# Altium PCB LPGDetA1.PcbDoc
Units mm, origin at the board's own origin, x right, y up, seen from the top; angles counter-clockwise.
Board outline 105 x 100 mm, 2 copper layers (Top Layer, Bottom Layer), stack 1.62 mm thick; 159 components, 86 nets, 376 pads, 81 vias.
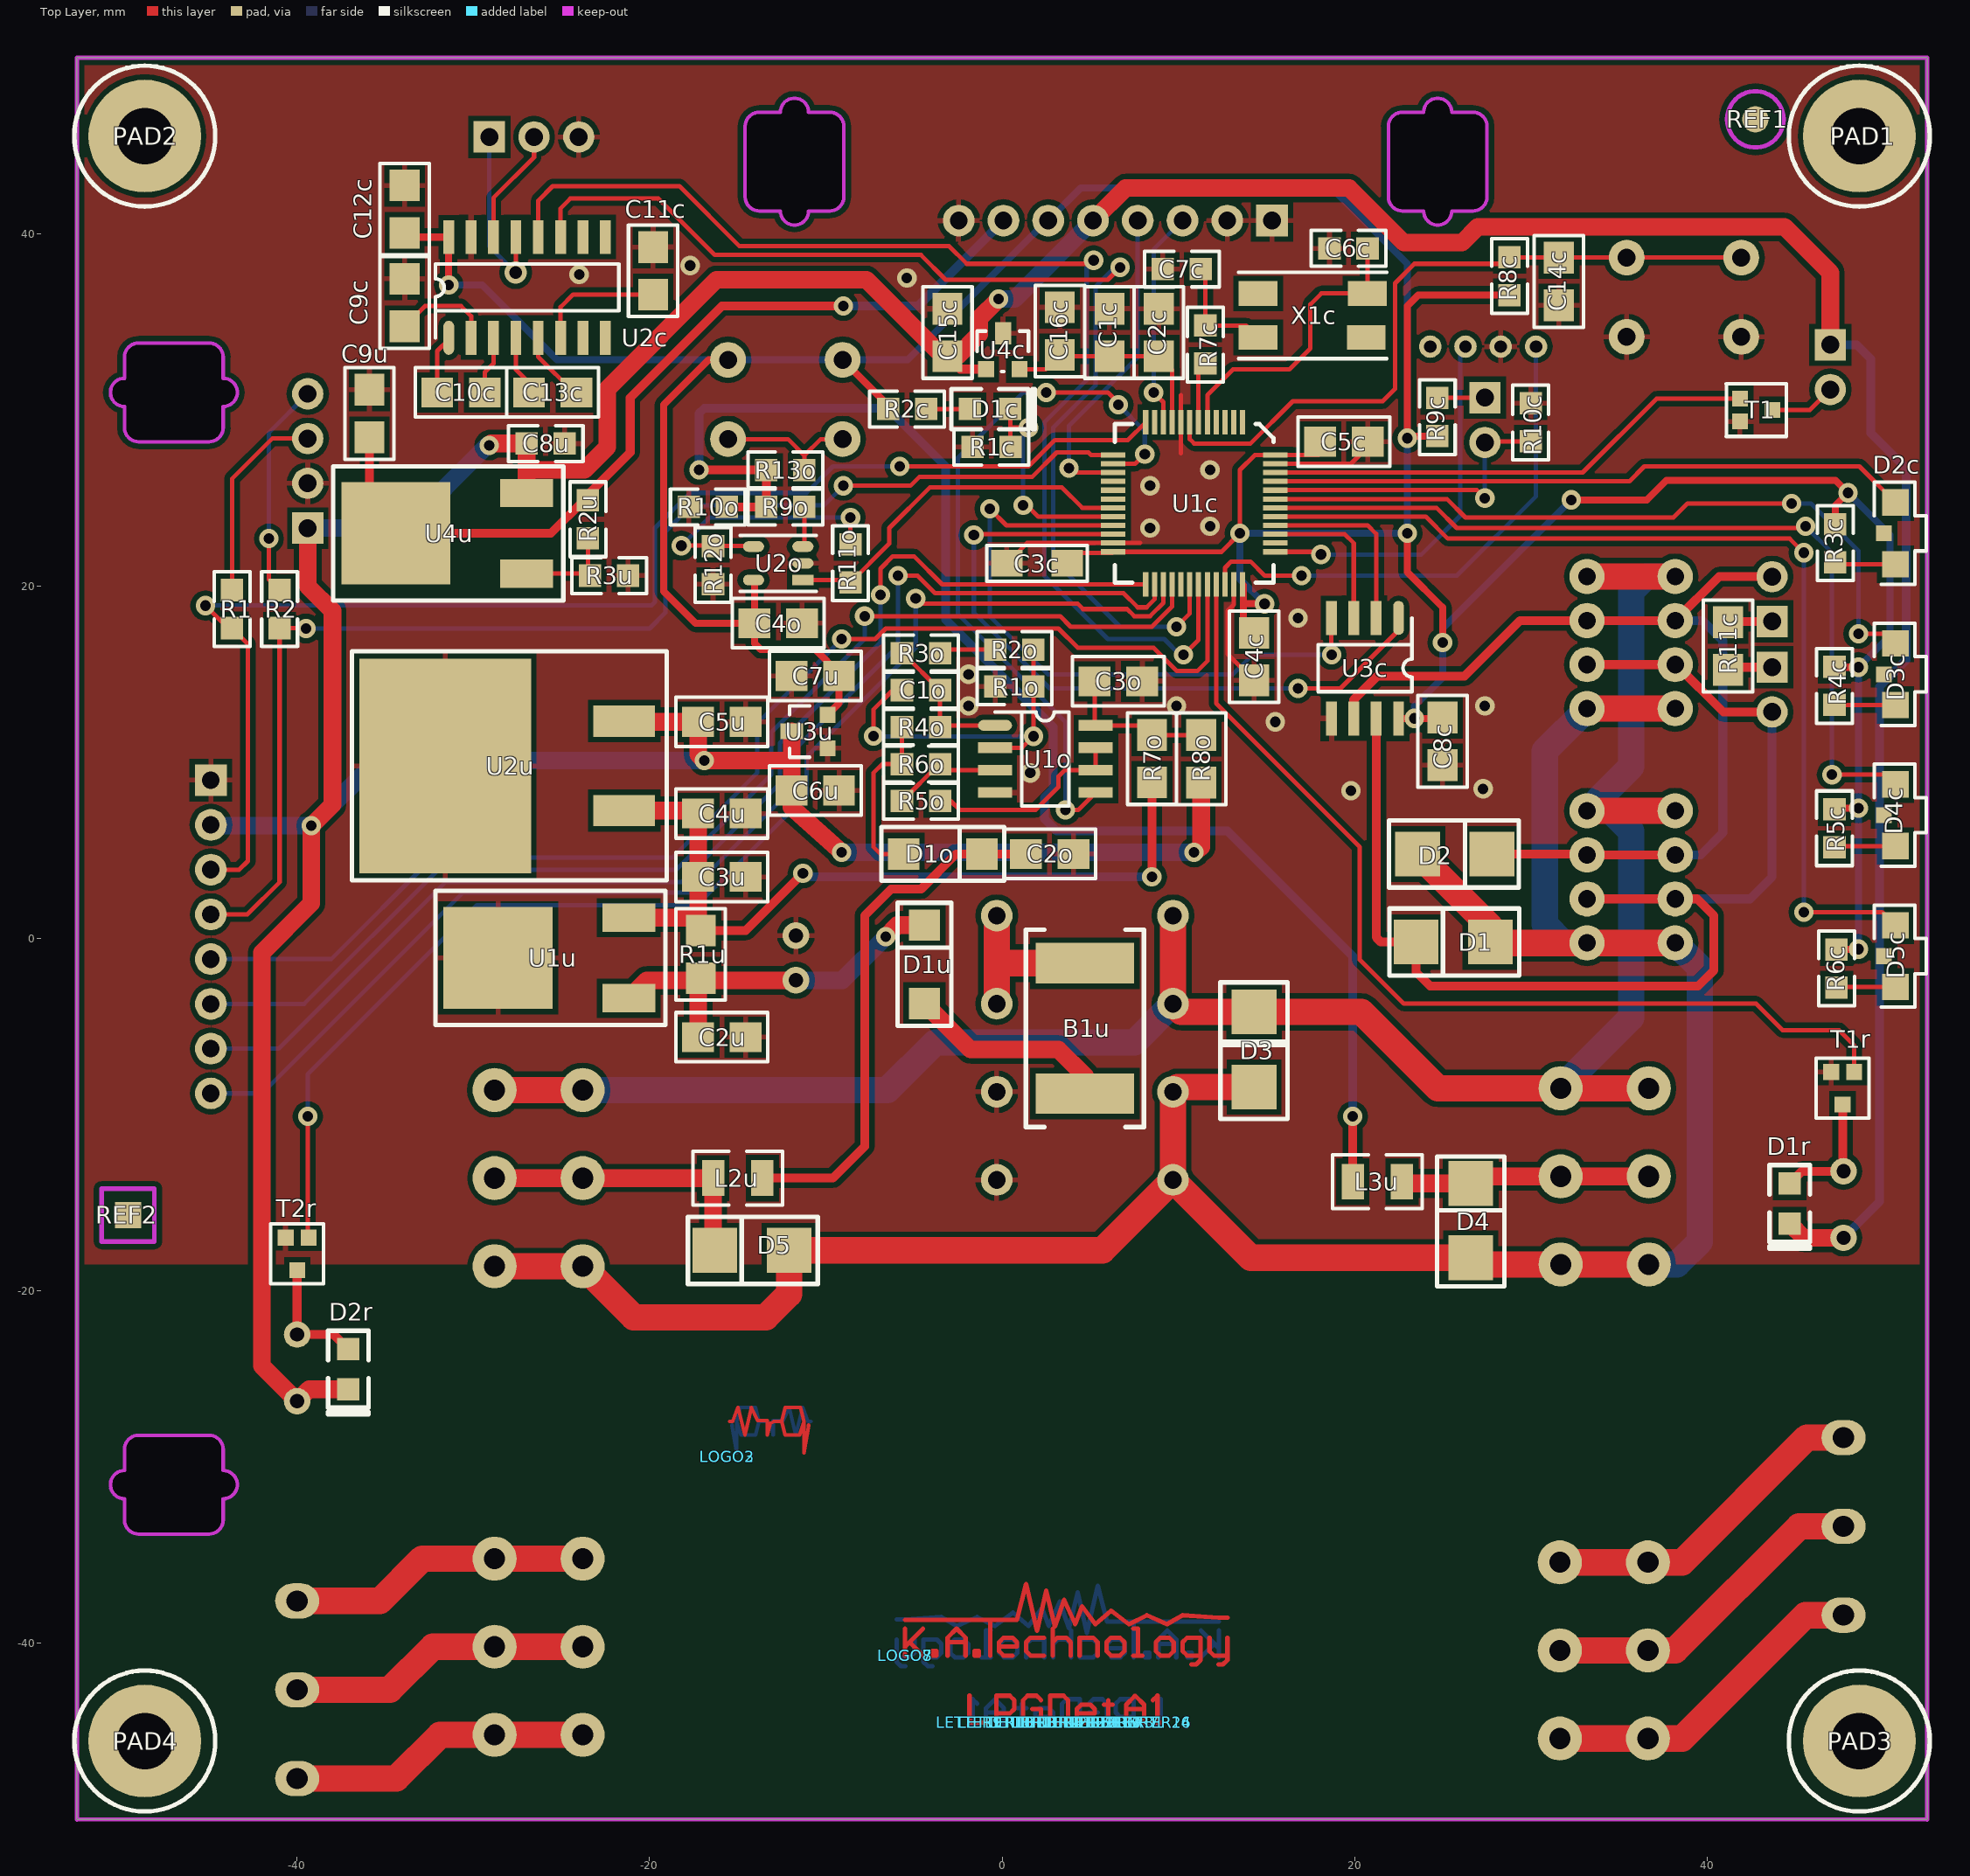
[diagram p0: Top Layer view]
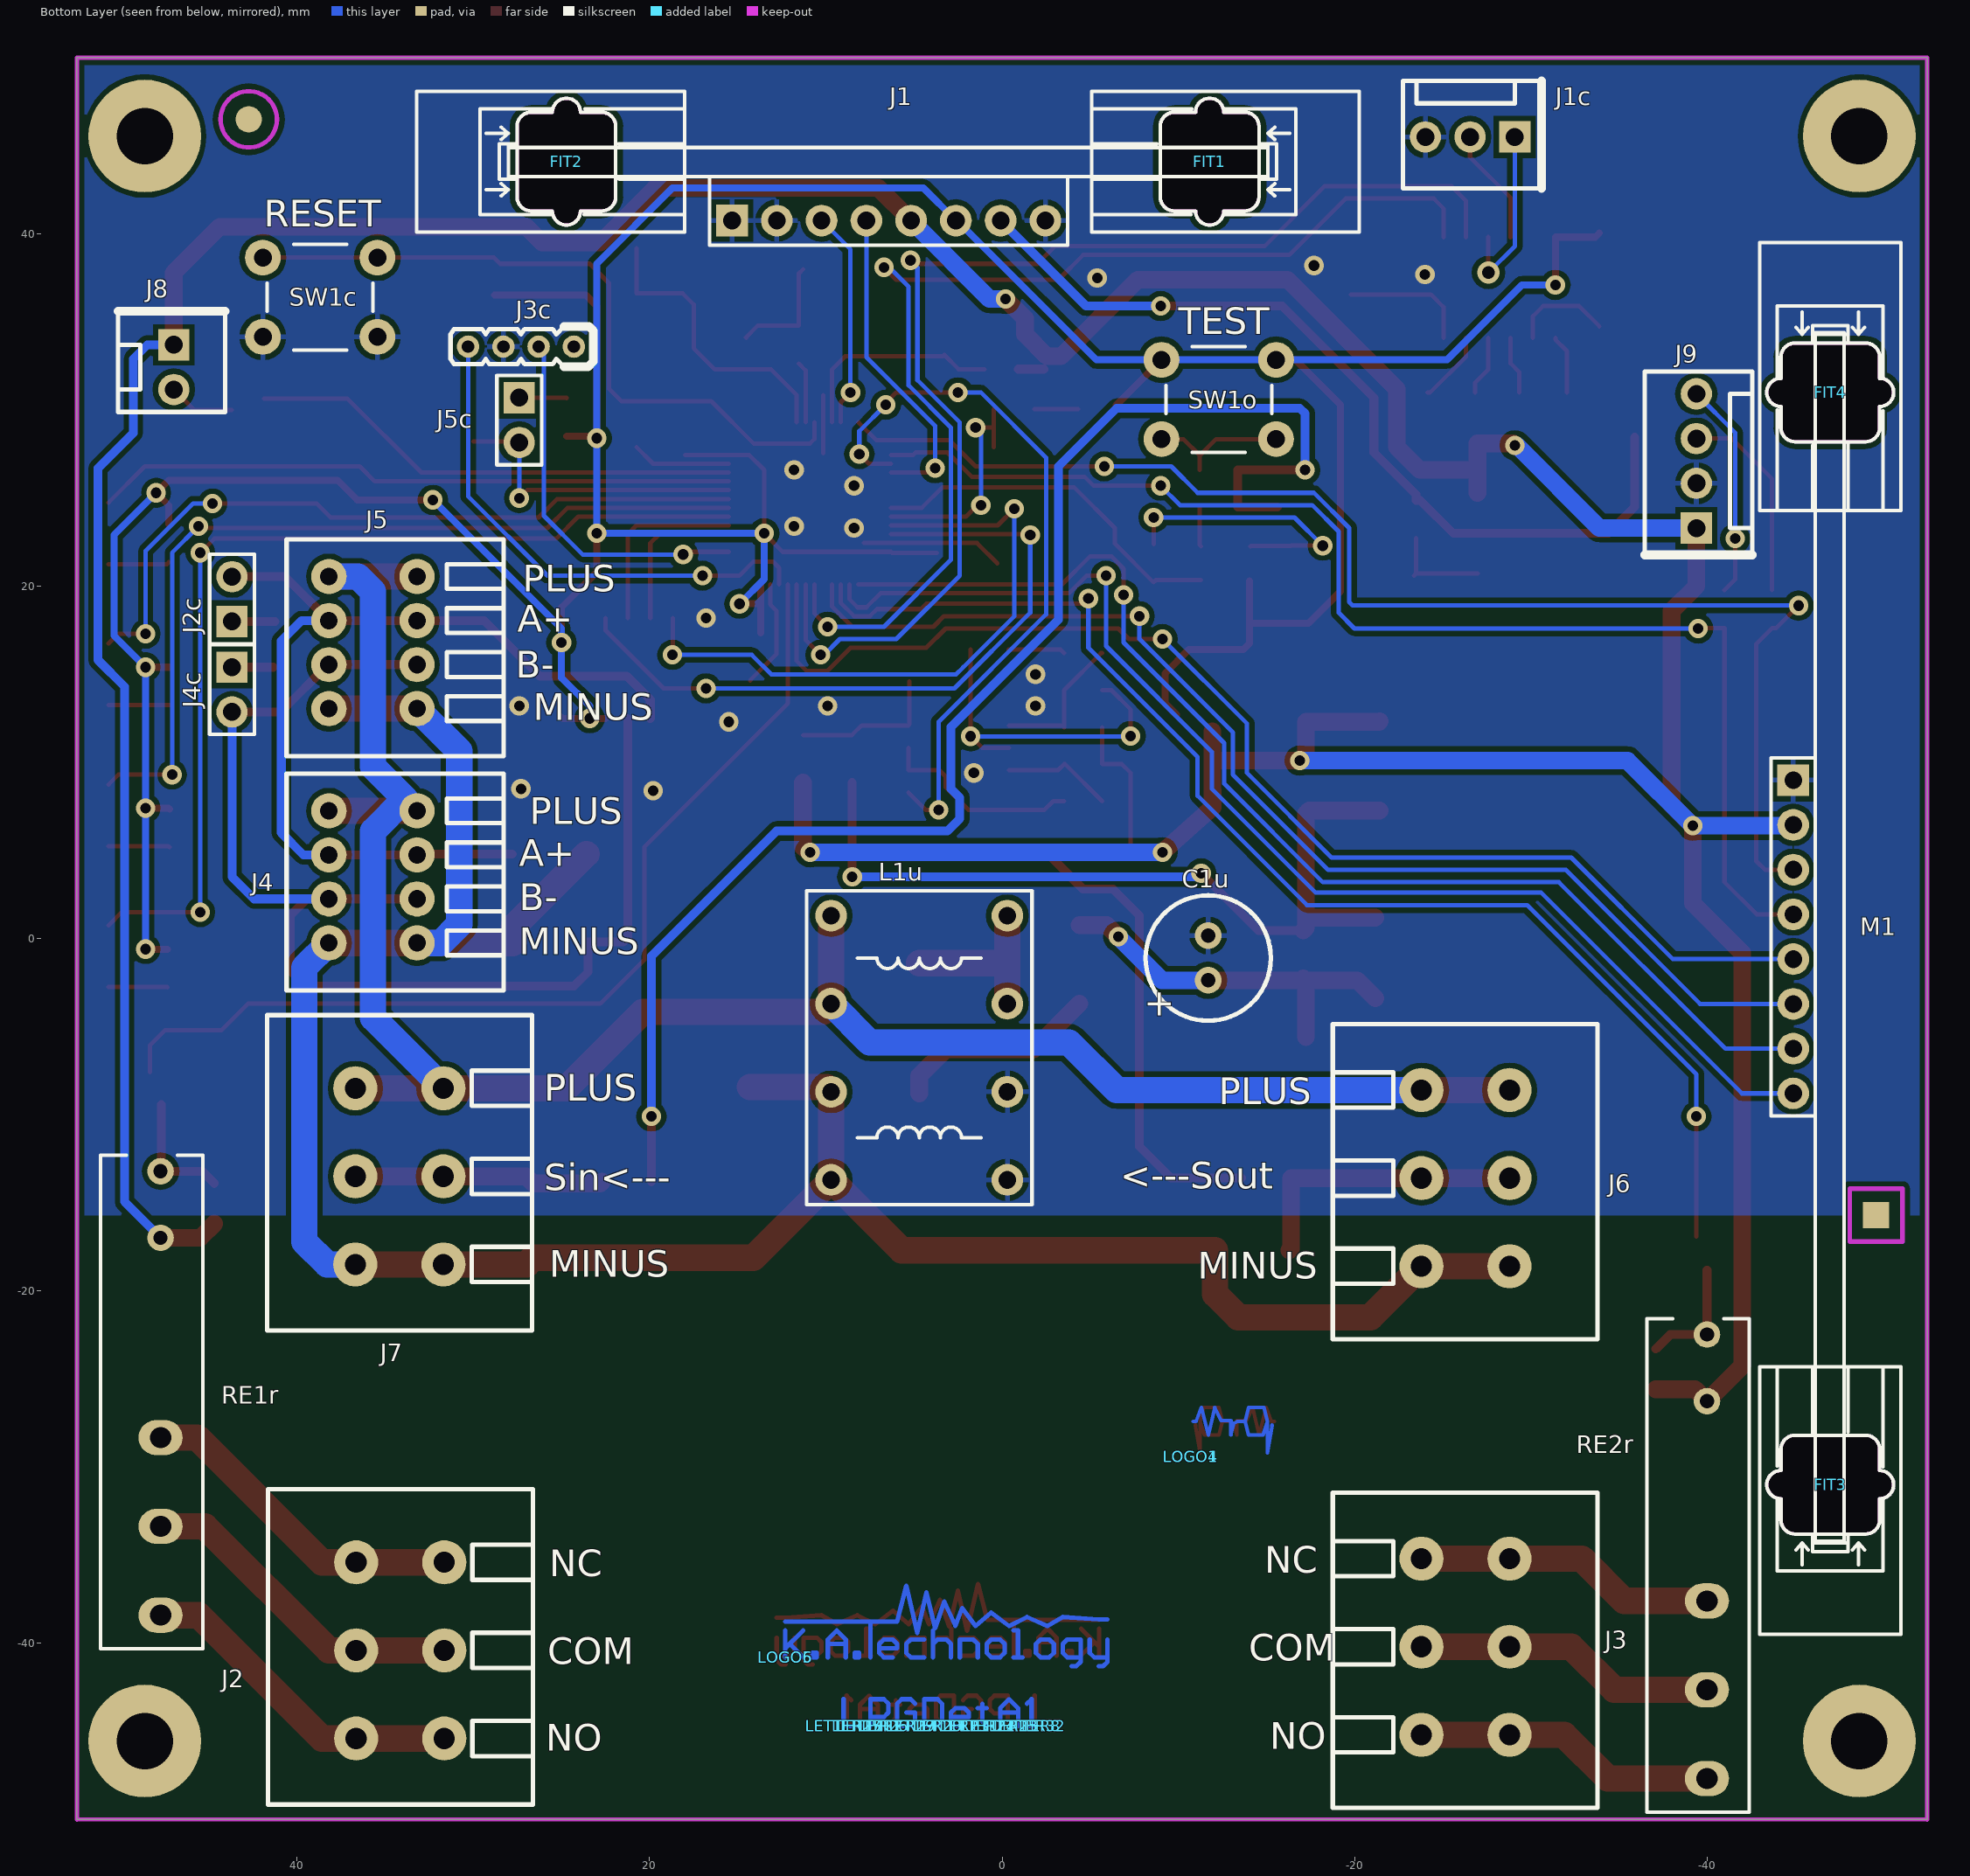
[diagram p1: Bottom Layer view, seen from below]

## Layer stack, top to bottom
Top Layer: signal copper 0.035
Dielectric: core 1.55, FR-4, Dk 4.8
Bottom Layer: signal copper 0.035

## Board outline
-52.5,-50 -52.5,50 52.5,50 52.5,-50

## Design rules (kind name [scope] priority, off if disabled: settings)
Clearance InPolyClearance [InPoly] p1: gap=0.3
Clearance [All] p2: gap=0.2
ComponentClearance [All] p1 off: gap=0.254 collisioncheckmode=3 verticalgap=0.254 showdistances=FALSE
Height [All] p1: minheight=0 maxheight=40 prefheight=12.7
HoleSize [All] p1: absolutevalues=TRUE maxlimit=6 minlimit=0.025 maxpercent=80.000 minpercent=20.000
MinimumSolderMaskSliver [not(IsComponentPrimitive and OnSolderMask)] p1: minsoldermaskwidth=0.1
PolygonConnect PolygonConnectDirect [IsVia] p1: connectstyle=Direct reliefconductorwidth=0.254 reliefentries=4 polygonreliefangle="90 Angle"
PolygonConnect PolygonConnectElse [All] p2: connectstyle=Relief reliefconductorwidth=0.3 reliefentries=4 polygonreliefangle="90 Angle"
RoutingVias [All] p1: holewidth=0.6 width=1.1 viastyle="Through Hole" minholewidth=0.5 minwidth=1 maxholewidth=2 maxwidth=4
SilkToSilkClearance [All] p1 off: silktosilkclearance=0.254
SilkscreenOverComponentPads [OnBottomSilkscreen] p1: minsilkscreentomaskgap=0.1
SolderMaskExpansion [All] p1: expansion=0.102
Width [All] p1: maxlimit=4 minlimit=0.2 preferedwidth=0.3
22 further rules are at their usual default settings.

## Classes and differential pairs
component class CPU: C1c C2c C3c C4c C5c C6c C7c C8c C9c C10c C11c C12c C13c C14c C15c C16c D1c D2c D3c D4c D5c J1c J2c J3c J4c J5c R1c R2c R3c R4c R5c R6c R7c R8c R9c R10c R11c SW1c U1c U2c U3c U4c X1c
component class LPGDetA1_main: D1 D2 D3 D4 D5 J1 J2 J3 J4 J5 J6 J7 J8 J9 M1 R1 R2 T1
component class Out: C1o C2o C3o C4o D1o R1o R2o R3o R4o R5o R6o R7o R8o R9o R10o R11o R12o R13o SW1o U1o U2o
component class Supply: B1u C1u C2u C3u C4u C5u C6u C7u C8u C9u D1u L1u L2u L3u R1u R2u R3u U1u U2u U3u U4u
component class Mechanical: FIT1 FIT2 FIT3 FIT4 LETTER1 LETTER2 LETTER3 LETTER4 LETTER5 LETTER6 LETTER7 LETTER8 LETTER9 LETTER10 LETTER11 LETTER12 LETTER13 LETTER14 LETTER15 LETTER16 LETTER17 LETTER18 LETTER19 LETTER20 LETTER21 LETTER22 LETTER23 LETTER24 LETTER25 LETTER26 LETTER27 LETTER28 LETTER29 LETTER30 LETTER31 LETTER32 LOGO1 LOGO2 LOGO3 LOGO4 LOGO5 LOGO6 LOGO7 LOGO8 PAD1 PAD2 PAD3 PAD4 REF1 REF2
component class Relay: D1r D2r RE1r RE2r T1r T2r

## Components (designator, comment, footprint, x,y, rotation, side; value= is the part's Value field where it differs from the comment)
B1u "SL030-60" 2920 4.7,-5.1 r90 top
C1c "C0805C105K4RAC" 1206_0805 6.1,34.4 r90 top
C1o "CL21C220JBANNNC" 0805 -4.6,14.1 r0 top
C1u "SD1V107M6L011BB" CE1028 -11.7,-1.1 r90 bottom
C2c "CL21B103KBANNNC" 1206_0805 8.9,34.4 r90 top
C2o "CL21B104KBCNNNC" 1206_0805 2.7,4.8 r180 top
C2u "CL21B104KBCNNNC" 1206_0805 -15.9,-5.6 r0 top
C3c "CL31B475KPHNNNE" 1206-IPC 3.7,21.3 r180 top
C3o "CL21B104KBCNNNC" 1206_0805 6.6,14.6 r0 top
C3u "CL21B104KBCNNNC" 1206_0805 -15.9,3.5 r0 top
C4c "CL21B104KBCNNNC" 1206_0805 14.3,16 r270 top
C4o "CL21B104KBCNNNC" 1206_0805 -12.7,17.9 r0 top
C4u "CL21B104KBCNNNC" 1206_0805 -15.9,7.1 r0 top
C5c "CL21B104KBCNNNC" 1206_0805 19.4,28.2 r0 top
C5u "CL21B104KBCNNNC" 1206_0805 -15.9,12.3 r0 top
C6c "CL21C220JBANNNC" 0805 19.663,39.178 r0 top
C6u "C0805C105K4RAC" 1206_0805 -10.6,8.4 r0 top
C7c "CL21C220JBANNNC" 0805 10.2,38 r0 top
C7u "C0805C105K4RAC" 1206_0805 -10.6,14.9 r180 top
C8c "CL21B104KBCNNNC" 1206_0805 25,11.2 r90 top
C8u "C0805C105K4RAC" 0805 -25.9,28.1 r0 top
C9c "CL21B104KBCNNNC" 1206_0805 -33.9,36.1 r90 top
C9u "C0805C105K4RAC" 1206_0805 -35.9,29.8 r90 top
C10c "CL21B104KBCNNNC" 1206_0805 -30.7,31 r0 top
C11c "CL21B104KBCNNNC" 1206_0805 -19.8,37.9 r90 top
C12c "CL21B104KBCNNNC" 1206_0805 -33.9,41.4 r90 top
C13c "CL21B104KBCNNNC" 1206_0805 -25.5,31 r0 top
C14c "CL21B104KBCNNNC" 1206_0805 31.6,37.3 r270 top
C15c "C0805C105K4RAC" 1206_0805 -3.1,34.4 r90 top
C16c "CL21B104KBCNNNC" 1206_0805 3.28,34.479 r90 top
D1 "P6SMB15A" SMB 23.5,-0.2 r90 top
D1c "OF-SMD2012R" D0805 -1.833,30.059 r0 top
D1o "10MQ040N" SMA -3.3,4.8 r270 top
D1r "1N4148-0805" D0805 44.7,-13.9 r270 top
D1u "10MQ040N" SMA -4.4,-1.4 r0 top
D2 "P6SMB15A" SMB 27.8,4.8 r270 top
D2c "KPA-3010SURCK" KPA-3010SURCK 50.7,23 r270 top locked
D2r "1N4148-0805" D0805 -37.1,-23.3 r270 top
D3 "P6SMB33CA" DO-214AA 14.3,-6.3 r0 top
D3c "KPA-3010SYCK" KPA-3010SYCK 50.7,15 r270 top locked
D4 "P6SMB15A" SMB 26.6,-13.9 r0 top
D4c "KPA-3010CGCK" KPA-3010CGCK 50.7,7 r270 top locked
D5 "P6SMB15A" SMB -16.3,-17.7 r90 top
D5c "KPA-3010QBC-D" KPA-3010QBC-D 50.7,-1 r270 top locked
FIT1 "VMCG20" VMCG20 -11.779,44.1 r270 bottom
FIT2 "VMCG20" VMCG20 24.721,44.1 r90 bottom
FIT3 "VMCG20" VMCG20 -47,-31 r0 bottom
FIT4 "VMCG20" VMCG20 -47,31 r180 bottom
J1 "LPGCODetA1" LPGCODetA1 28.021,44.9 r180 bottom
J1c "WF03S" WF03S -29.1,45.5 r0 bottom
J2 "Wago256-401x3" WAGO256-401x3 31.655,-35.406 r270 bottom
J2c "JUMPERx2" 2SIP100 43.7,18 r90 bottom
J3 "Wago256-401x3" WAGO256-401x3 -23.8,-45.2 r90 bottom
J3c "PLMS4S" PLMS4S 24.3,33.6 r0 bottom
J4 "Wago233-204" Wago233-204 35.7,3.5 r270 bottom
J4c "JUMPERx2" 2SIP100 43.7,15.4 r270 bottom
J5 "Wago233-204" Wago233-204 35.7,16.8 r270 bottom
J5c "JUMPERx2" 2SIP100 27.4,30.7 r270 bottom
J6 "Wago256-401x3" WAGO256-401x3 -23.8,-18.6 r90 bottom
J7 "Wago256-401x3" WAGO256-401x3 31.7,-8.5 r270 bottom
J8 "WF02S" WF02S 47,33.7 r270 bottom
J9 "WF04S" WF04S -39.4,23.3 r90 bottom
L1u "CAX-0.4-39" IND_CAX_V 4.7,-6.2 r270 bottom
L2u "BLM31P500SPT" 1206 -15,-13.6 r0 top
L3u "BLM31P500SPT" 1206 21.3,-13.8 r180 top
LETTER1 "LETTERC_L" LETTERC_L_60_10_TL -1.848,-44.5 r0 top
LETTER2 "LETTERC_P" LETTERC_P_60_10_TL 7.472,-44.7 r180 bottom
LETTER3 "LETTERC_G" LETTERC_G_60_10_TL 1.2,-44.5 r0 top
LETTER4 "LETTERC_D" LETTERC_D_60_10_TL 2.724,-44.5 r0 top
LETTER5 "LETTER_E" LETTER_E_60_10_TL 4.248,-44.5 r0 top
LETTER6 "LETTER_T" LETTER_T_60_10_TL 5.772,-44.5 r0 top
LETTER7 "LETTERC_A" LETTERC_A_60_10_TL 7.042,-44.5 r0 top
LETTER8 "LETTER_1" LETTER_1_60_10_TL -1.418,-44.7 r180 bottom
LETTER9 "LETTERC_L" LETTERC_L_60_20_TS -1.848,-44.5 r0 top
LETTER10 "LETTERC_P" LETTERC_P_60_20_TS -0.324,-44.5 r0 top
LETTER11 "LETTERC_G" LETTERC_G_60_20_TS 1.2,-44.5 r0 top
LETTER12 "LETTERC_D" LETTERC_D_60_20_TS 2.724,-44.5 r0 top
LETTER13 "LETTER_E" LETTER_E_60_20_TS 2.9,-44.7 r180 bottom
LETTER14 "LETTER_T" LETTER_T_60_20_TS 1.376,-44.7 r180 bottom
LETTER15 "LETTERC_A" LETTERC_A_60_20_TS 0.106,-44.7 r180 bottom
LETTER16 "LETTER_1" LETTER_1_60_20_TS 8.566,-44.5 r0 top
LETTER17 "LETTERC_L" LETTERC_L_60_10_TL 8.996,-44.7 r180 bottom
LETTER18 "LETTERC_P" LETTERC_P_60_10_TL -0.324,-44.5 r0 top
LETTER19 "LETTERC_G" LETTERC_G_60_10_TL 5.948,-44.7 r180 bottom
LETTER20 "LETTERC_D" LETTERC_D_60_10_TL 4.424,-44.7 r180 bottom
LETTER21 "LETTER_E" LETTER_E_60_10_TL 2.9,-44.7 r180 bottom
LETTER22 "LETTER_T" LETTER_T_60_10_TL 1.376,-44.7 r180 bottom
LETTER23 "LETTERC_A" LETTERC_A_60_10_TL 0.106,-44.7 r180 bottom
LETTER24 "LETTER_1" LETTER_1_60_10_TL 8.566,-44.5 r0 top
LETTER25 "LETTERC_L" LETTERC_L_60_20_TS 8.996,-44.7 r180 bottom
LETTER26 "LETTERC_P" LETTERC_P_60_20_TS 7.472,-44.7 r180 bottom
LETTER27 "LETTERC_G" LETTERC_G_60_20_TS 5.948,-44.7 r180 bottom
LETTER28 "LETTERC_D" LETTERC_D_60_20_TS 4.424,-44.7 r180 bottom
LETTER29 "LETTER_E" LETTER_E_60_20_TS 4.248,-44.5 r0 top
LETTER30 "LETTER_T" LETTER_T_60_20_TS 5.772,-44.5 r0 top
LETTER31 "LETTERC_A" LETTERC_A_60_20_TS 7.042,-44.5 r0 top
LETTER32 "LETTER_1" LETTER_1_60_20_TS -1.418,-44.7 r180 bottom
LOGO1 "MRQ_2_8" MRQ_2_8_TL -10.7,-29.4 r180 bottom
LOGO2 "MRQ_2_8" MRQ_2_8_TL -15.6,-29.4 r0 top
LOGO3 "MRQ_2_8" MRQ_2_16_TS -15.6,-29.4 r0 top
LOGO4 "MRQ_2_8" MRQ_2_16_TS -10.7,-29.4 r180 bottom
LOGO5 "KATECHNOLOGYLOGO" KATECHNOLOGYLOGO_TL 12.3,-40.8 r180 bottom
LOGO6 "KATECHNOLOGYLOGO" KATECHNOLOGYLOGO_TS 12.3,-40.8 r180 bottom
LOGO7 "KATECHNOLOGYLOGO" KATECHNOLOGYLOGO_TL -5.5,-40.7 r0 top
LOGO8 "KATECHNOLOGYLOGO" KATECHNOLOGYLOGO_TS -5.5,-40.7 r0 top
M1 "LPGDetAUX" LPGDETAUX -44.9,0.1 r270 bottom
PAD1 "PAD3_2MM" PAD3_2MM 48.65,45.55 r0 top locked
PAD2 "PAD3_2MM" PAD3_2MM -48.65,45.55 r0 top locked
PAD3 "PAD3_2MM" PAD3_2MM 48.65,-45.55 r0 top locked
PAD4 "PAD3_2MM" PAD3_2MM -48.65,-45.55 r0 top locked
R1 "0805WAJ 3K3 T5E" 0805 -43.7,18.7 r270 top
R1c "0805WAF10KT5E" 0805 -0.6,27.9 r180 top
R1o "0805WAF 100K T5E" 0805 0.7,14.3 r180 top
R1u "0805WAJ 0R T5E" 1206_0805 -17.1,-0.9 r90 top
R2 "0805WAJ 3K3 T5E" 0805 -41,18.7 r270 top
R2c "0805WAF 220R T5E" 0805 -5.389,30.059 r180 top
R2o "0805WAF 2K4 T5E" 0805 0.7,16.4 r180 top
R2u "0805WAF 200R T5E" 0805 -23.5,23.8 r270 top
R3c "0805WAF 220R T5E" 0805 47.28,22.44 r90 top
R3o "0805WAF 30R T5E" 0805 -4.6,16.2 r0 top
R3u "0805WAF 120R T5E" 0805 -22.3,20.6 r0 top
R4c "0805WAF 220R T5E" 0805 47.24,14.34 r90 top
R4o "0805WAF 30R T5E" 0805 -4.6,12 r0 top
R5c "0805WAF 220R T5E" 0805 47.24,6.26 r90 top
R5o "0805WAF 100K T5E" 0805 -4.6,7.8 r0 top
R6c "0805WAJ 0R T5E" 0805 47.36,-1.7 r90 top
R6o "0805WAF 2K4 T5E" 0805 -4.6,9.9 r180 top
R7c "0805WAF 220R T5E" 0805 11.535,33.717 r270 top
R7o "0805WAJ 0R T5E" 1206_0805 8.509,10.21 r270 top
R8c "0805WAJ 100K T5E" 0805 28.8,37.6 r90 top
R8o "0805WAJ 0R T5E" 1206_0805 11.3,10.2 r90 top
R9c "0805WAJ 510R T5E" 0805 24.7,29.6 r90 top
R9o "0805WAJ 100K T5E" 0805 -12.3,24.5 r180 top
R10c "0805WAF10KT5E" 0805 30,29.3 r270 top
R10o "0805WAF 30R T5E" 0805 -16.7,24.5 r180 top
R11c "0805WAJ 120R T5E" 1206_0805 41.2,16.6 r270 top
R11o "0805WAF 30K T5E" 0805 -8.6,21.3 r90 top
R12o "0805WAF10KT5E" 0805 -16.4,21.2 r270 top
R13o "0805WAJ 300R T5E" 0805 -12.3,26.6 r180 top
RE1r "RM699BV-3011-85-1005" RM699BV 47.752,-13.208 r270 bottom
RE2r "RM699BV-3011-85-1005" RM699BV -40.005,-22.479 r270 bottom
REF1 "REF_CIR" REF_CIR 42.75,46.5 r90 top
REF2 "REF_REC" REF_REC -49.6,-15.7 r90 top
SW1c "DTS63K" DTS63K 38.7,36.4 r270 bottom
SW1o "DTS63K" DTS63K -12.3,30.6 r270 bottom
T1 "2N7002PW" SOT323-3_FLOW 42.8,30 r270 top
T1r "2N7002PW" SOT323-3_FLOW 47.7,-8.5 r180 top
T2r "2N7002PW" SOT323-3_FLOW -40,-17.9 r180 top
U1c "STM32F100C8T6B" MS-026ABC 10.9,24.7 r270 top
U1o "LM258D" 8SOIC150 -0.4,12.1 r0 top
U1u "78M09CDT" TO-252 -28.6,-1.1 r0 top
U2c "ST3232CD" 16SOIC150 -31.4,34.1 r90 top
U2o "MCP6L71T-E/OT" SOT23-5 -12.7,21.3 r180 top
U2u "L7805ACD2T" D2PAK -31.6,9.8 r90 top
U3c "ST3485EB" 8SOIC150 22.5,18.2 r270 top
U3u "MCP1700T3302ETT" SOT23-3 -9.9,10.8 r90 top
U4c "REF2933AIDBZT" SOT23-3 -0.911,32.32 r0 top
U4u "ZLDO1117KTC" TO-252 -34.4,23 r0 top
X1c "8MHz" HXC-7SB 17.631,35.368 r180 top

## Footprints (in the part's own frame and the unit in brackets; to place one, negate y for a bottom-side part, rotate by r counter-clockwise, add the part's x,y. Pads: shape width x height; smd on the part's side, far side on the other; paste and mask are expansions set on the pad)
2SIP100 [mil]
  rect 70x70 hole 40: 1(0,0)
  round 70 hole 40: 2(100,0)
  silkscreen extent -50,-50 150,50
8SOIC150 [mil]
  oval 76x24 smd: 1(0,0)
  rect 76x24 smd: 2(0,-50) 3(0,-100) 4(0,-150) 5(225,-150) 6(225,-100) 7(225,-50) 8(225,0)
  silkscreen extent 0,-180 165,30, body extent -10,-173 235,23, height 67
16SOIC150 [mil]
  oval 76x24 smd: 1(0,0)
  rect 76x24 smd: 2(0,-50) 3(0,-100) 4(0,-150) 5(0,-200) 6(0,-250) 7(0,-300) 8(0,-350) 9(225,-350) 10(225,-300) 11(225,-250) 12(225,-200) 13(225,-150) 14(225,-100) 15(225,-50) 16(225,0)
  silkscreen extent 0,-380 165,30, body extent -10,-374 235,23, height 67
0805 [mil]
  rect 50x50 smd: 1(-42.5,0) 2(42.5,0)
  silkscreen extent -84,-40 84,40, body extent -39,-28 39,28, height 51
1206 [mil]
  rect 50x80 smd: 1(-55,0) 2(55,0)
  silkscreen extent -100,-60 100,60, body extent -55,-39 55,39, height 22
1206-IPC [mil]
  rect 70x60 smd: 1(0,0) 2(135,0)
  silkscreen extent -45,-40 180,40, body extent 12,-31 122,31, height 22
1206_0805 [mm]
  rect 1.8x1.7 smd: 1(-1.35,0) 2(1.35,0)
  silkscreen extent -2.6,-1.4 2.6,1.4, body extent -1.7,-0.89 1.7,0.89, height 2.56
2920 [mm]
  rect 2.3x5.6 smd: 1(-3.7,0) 2(3.7,0)
  silkscreen extent -5.6,-3.35 5.6,3.35
CE1028 [mil]
  round 60 hole 32: 1(50,0) 2(-50,0)
  silkscreen extent -140,-140 140,140, body extent -138,-138 137,138, height 591
D2PAK [mil]
  rect 70x137.8 smd: 1(-100,-400) 3(100,-400)
  rect 480x384 smd: 2(0,0)
  silkscreen extent -256,-495 256,209, body extent -213,-431 213,189, height 189
D0805 [mil]
  rect 50x50 smd: ANOD(0,0) CATH(90,0)
  silkscreen extent -41,-45 146,45, body extent 3,-28 82,28, height 51
DO-214AA [mm]
  rect 2.54x2.54 smd: ANOD(0,-2.135) CATH(0,2.135)
  silkscreen extent -1.91,-3.94 1.91,3.81
DTS63K [mil]
  round 80 hole 40: 1(88.58,127.95) 2(88.58,-127.95) 3(-88.58,127.95) 4(-88.58,-127.95)
  silkscreen extent -118,-118 118,118, body extent -118,-134 118,134, height 276
HXC-7SB [mm]
  rect 2.2x1.4 smd: 1(-3.1,-1.25) 2(3.1,1.25) 3(3.1,-1.25) 4(-3.034,1.25)
  silkscreen extent -4.2,-2.45 4.2,2.45, body extent -3.6,-1.5 3.6,1.5, height 1.5
IND_CAX_V [mm]
  round 1.8 hole 1: 1(-7.5,-5) 2(-2.5,-5) 3(2.5,-5) 4(7.5,-5) 5(7.5,5) 6(2.5,5) 7(-2.5,5) 8(-7.5,5)
  silkscreen extent -8.9,-6.4 8.9,6.4, body extent -8.9,-6.4 8.9,6.4, height 20
KATECHNOLOGYLOGO_TL [mm]
  Top Layer lines w0.254: 18.288,0 17.526,0 17.272,0.254 17.272,1.016 ; 18.288,1.016 18.288,-0.254 18.034,-0.508 17.78,-0.508 ; 18.288,2.159 17.78,2.159 15.748,2.286 14.859,1.778 13.716,2.286 12.7,1.778 11.684,2.54 10.795,1.778 10.033,2.794 9.652,1.778 9.017,3.175 8.509,1.651 8.001,3.683 7.493,1.397 6.858,4.064 6.35,2.032 4.826,2.032 ; 16.764,0 16.002,0 15.748,0.254 15.748,0.762 16.002,1.016 16.764,1.016 16.764,-0.254 16.51,-0.508 16.256,-0.508 ; 13.462,0 12.954,0 ; 13.208,0 13.208,1.524 12.954,1.524 ; 10.922,0 10.922,0.762 10.668,1.016 9.906,1.016 9.906,0 ; 9.398,0 9.398,0.762 9.144,1.016 8.636,1.016 8.382,0.762 ; 8.382,0 8.382,1.524 ; 7.874,0 7.112,0 6.858,0.254 6.858,0.762 7.112,1.016 7.874,1.016 ; 6.096,0 5.588,0 5.334,0.254 5.334,0.762 5.588,1.016 6.096,1.016 6.35,0.762 6.35,0.508 5.334,0.508 ; 4.826,0 4.826,2.032 ; 3.429,0 3.429,1.016 2.921,1.524 2.413,1.016 2.413,0 ; 3.429,0.762 2.413,0.762 ; 1.016,0 0.254,0.762 ; 1.016,1.524 0,0.508 ; 0,0 0,1.524 ; 0,2.032 4.826,2.032 ; 15.24,0.254 14.986,0 14.478,0 14.224,0.254 14.224,0.762 14.478,1.016 14.986,1.016 15.24,0.762 15.24,0.254 ; 12.446,0.254 12.192,0 11.684,0 11.43,0.254 11.43,0.762 11.684,1.016 12.192,1.016 12.446,0.762 12.446,0.254 ; 4.191,0 3.937,0 3.937,0.254 4.191,0.254 4.191,0 ; 1.778,0 1.524,0 1.524,0.127 1.524,0.254 1.778,0.254 1.778,0
  body extent -0.13,-0.64 18.41,4.19, height 0.3
KATECHNOLOGYLOGO_TS [mm]
KPA-3010CGCK [mm]
  rect 0.9x0.9 smd: 0(0,-0.65)
  rect 1.5x1.5 smd: ANOD(1.75,0) CATH(-1.75,0)
  silkscreen extent -2.9,-1.2 2.9,1.76, body extent -1.5,-0.24 1.5,1.76, height 1
KPA-3010QBC-D [mm]
  rect 0.9x0.9 smd: 0(0,-0.65)
  rect 1.5x1.5 smd: ANOD(1.75,0) CATH(-1.75,0)
  silkscreen extent -2.9,-1.2 2.9,1.76, body extent -1.5,-0.24 1.5,1.76, height 1
KPA-3010SURCK [mm]
  rect 0.9x0.9 smd: 0(0,-0.65)
  rect 1.5x1.5 smd: ANOD(1.75,0) CATH(-1.75,0)
  silkscreen extent -2.9,-1.2 2.9,1.76, body extent -1.5,-0.24 1.5,1.76, height 1
KPA-3010SYCK [mm]
  rect 0.9x0.9 smd: 0(0,-0.65)
  rect 1.5x1.5 smd: ANOD(1.75,0) CATH(-1.75,0)
  silkscreen extent -2.9,-1.2 2.9,1.76, body extent -1.5,-0.24 1.5,1.76, height 1
LETTER_1_60_10_TL [mm]
  Top Layer lines w0.254: 0.508,0 0,0 ; 0.254,0 0.254,1.524 0,1.27
  body extent -0.13,-0.13 0.64,1.65, height 0.3
LETTER_1_60_20_TS [mm]
LETTER_E_60_10_TL [mm]
  Top Layer lines w0.254: 0,0.508 1.016,0.508 1.016,0.762 0.762,1.016 0.254,1.016 0,0.762 0,0.254 0.254,0 0.762,0
  body extent -0.13,-0.13 1.14,1.14, height 0.3
LETTER_E_60_20_TS [mm]
LETTER_T_60_10_TL [mm]
  Top Layer lines w0.254: 0,1.016 0.508,1.016 ; 0.254,1.27 0.254,0.254 0.508,0
  body extent -0.13,-0.13 0.63,1.4, height 0.3
LETTER_T_60_20_TS [mm]
LETTERC_A_60_10_TL [mm]
  Top Layer lines w0.254: 0,0 0,1.016 0.483,1.499 0.533,1.499 1.016,1.016 1.016,0 ; 0,0.762 1.016,0.762
  body extent -0.13,-0.13 1.14,1.63, height 0.3
LETTERC_A_60_20_TS [mm]
LETTERC_D_60_10_TL [mm]
  Top Layer lines w0.254: 0,0 0.762,0 1.016,0.254 1.016,1.27 0.762,1.524 0,1.524 0,0
  body extent -0.13,-0.13 1.14,1.65, height 0.3
LETTERC_D_60_20_TS [mm]
LETTERC_G_60_10_TL [mm]
  Top Layer lines w0.254: 0.508,0.762 1.016,0.762 1.016,0.254 0.762,0 0.254,0 0,0.254 0,1.27 0.254,1.524 0.762,1.524 1.016,1.27
  body extent -0.13,-0.13 1.14,1.65, height 0.3
LETTERC_G_60_20_TS [mm]
LETTERC_L_60_10_TL [mm]
  Top Layer lines w0.254: 0,1.524 0,0 1.016,0
  body extent -0.13,-0.13 1.14,1.65, height 0.3
LETTERC_L_60_20_TS [mm]
LETTERC_P_60_10_TL [mm]
  Top Layer lines w0.254: 0,0 0,1.524 0.762,1.524 1.016,1.27 1.016,0.762 0.762,0.508 0,0.508
  body extent -0.13,-0.13 1.14,1.65, height 0.3
LETTERC_P_60_20_TS [mm]
LPGCODetA1 [mm]
  rect 1.8x1.8 hole 1: 1(12.7,-4.145)
  round 1.8 hole 1: 2(15.24,-4.145) 3(17.78,-4.145) 4(20.32,-4.145) 5(22.86,-4.145) 6(25.4,-4.145) 7(27.94,-4.145) 8(30.48,-4.145)
  silkscreen extent 0,-5.55 43.1,0, body extent 11.43,-5.41 31.75,-2.87, height 8.54
LPGDETAUX [mm]
  rect 1.8x1.8 hole 1: 1(-8.89,0)
  round 1.8 hole 1: 2(-6.35,0) 3(-3.81,0) 4(-1.27,0) 5(1.27,0) 6(3.81,0) 7(6.35,0) 8(8.89,0)
  silkscreen extent -34.3,-1.25 34.3,2.9, body extent -34.3,-1.27 34.3,2.9, height 30
MRQ_2_8_TL [mm]
  Top Layer lines w0.203: 4.623,1.778 4.369,0.203 4.369,1.981 ; 0.152,1.981 0.305,1.981 0.61,2.794 1.016,1.219 1.372,2.794 1.727,2.032 2.286,2.032 2.286,1.219 2.438,1.88 2.642,1.981 3.099,1.981 ; 4.369,1.981 4.166,2.794 3.302,2.794 3.099,1.981 ; 4.369,1.981 4.115,1.219 3.302,1.219 3.099,1.981
  body extent 0.05,0.1 4.72,2.9, height 0.3
MRQ_2_16_TS [mm]
MS-026ABC [mm]
  rect 1.4x0.3 smd: 1(-4.6,2.75) 2(-4.6,2.25) 3(-4.6,1.75) 4(-4.6,1.25) 5(-4.6,0.75) 6(-4.6,0.25) 7(-4.6,-0.25) 8(-4.6,-0.75) 9(-4.6,-1.25) 10(-4.6,-1.75) 11(-4.6,-2.25) 12(-4.6,-2.75) 25(4.6,-2.75) 26(4.6,-2.25) 27(4.6,-1.75) 28(4.6,-1.25) 29(4.6,-0.75) 30(4.6,-0.25) 31(4.6,0.25) 32(4.6,0.75) 33(4.6,1.25) 34(4.6,1.75) 35(4.6,2.25) 36(4.6,2.75)
  rect 0.3x1.4 smd: 13(-2.75,-4.6) 14(-2.25,-4.6) 15(-1.75,-4.6) 16(-1.25,-4.6) 17(-0.75,-4.6) 18(-0.25,-4.6) 19(0.25,-4.6) 20(0.75,-4.6) 21(1.25,-4.6) 22(1.75,-4.6) 23(2.25,-4.6) 24(2.75,-4.6) 37(2.75,4.6) 38(2.25,4.6) 39(1.75,4.6) 40(1.25,4.6) 41(0.75,4.6) 42(0.25,4.6) 43(-0.25,4.6) 44(-0.75,4.6) 45(-1.25,4.6) 46(-1.75,4.6) 47(-2.25,4.6) 48(-2.75,4.6)
  silkscreen extent -4.5,-4.5 4.5,4.5, body extent -4.6,-4.6 4.6,4.6, height 1.6
PAD3_2MM [mm]
  round 6.4 hole 3.2: 1(0,0)
  silkscreen extent -4,-4 4,4
PLMS4S [mil]
  round 50 hole 28: 1(0,0) 2(78.74,0) 3(157.48,0) 4(236.22,0)
  silkscreen extent -43,-45 276,45, body extent -39,-39 276,39, height 236
REF_CIR [mm]
  round 1.5 smd paste-0.75 mask+0.75: 1(0,0)
  round 1.5 smd far side paste-0.75 mask+0.75: 1(0,0)
  Top Layer keep-out circle w0.254: c0,0 r1.6
  Bottom Layer keep-out circle w0.254: c0,0 r1.6
REF_REC [mm]
  rect 1.5x1.5 smd paste-0.75 mask+0.75: 1(0,0)
  rect 1.5x1.5 smd far side paste-0.75 mask+0.75: 1(0,0)
  Top Layer keep-out lines w0.254: -1.5,1.5 1.5,1.5 1.5,-1.5 -1.5,-1.5 -1.5,1.5
  Bottom Layer keep-out lines w0.254: -1.5,1.5 -1.5,-1.5 1.5,-1.5 1.5,1.5 -1.5,1.5
RM699BV [mm]
  round 1.5 hole 0.8: 1(0,0) 2(3.78,0)
  oval 2x2.5 hole 1.2: 11(20.16,0) 12(15.12,0) 14(25.2,0)
  silkscreen extent -0.9,-3.4 27.1,2.4, body extent -0.9,-3.4 27.1,2.4, height 15
SMA [mil]
  rect 70x70 smd: ANOD(0,-90) CATH(0,85)
  silkscreen extent -60,-140 60,135, body extent -59,-106 59,106, height 98
SMB [mil]
  rect 100x100 smd: ANOD(0,-166) CATH(0,0)
  silkscreen extent -75,-230 75,60, body extent -77,-205 75,39, height 94
SOT23-3 [mil]
  rect 36x36 smd: 1(0,0) 2(75,0)
  rect 36x50 smd: 3(38,80)
  silkscreen extent -20,-5 95,85, body extent -22,-7 97,87, height 43
SOT23-5 [mm]
  rect 1.2x0.6 smd: 1(-1.4,0.95)
  oval 1.2x0.6 smd: 2(-1.4,0) 3(-1.4,-0.95) 4(1.4,-0.95) 5(1.4,0.95)
  silkscreen extent -2.16,-1.59 2.16,1.59, body extent -1.5,-1.45 1.5,1.45, height 1.45
SOT323-3_FLOW [mm]
  rect 0.9x0.9 smd: 1(-0.65,-0.925) 2(0.65,-0.925) 3(0,0.925)
  silkscreen extent -1.5,-1.7 1.5,1.7, body extent -1,-1 1,1, height 1.1
TO-252 [mil]
  rect 118x63 smd: 1(292,-90) 3(292,90)
  rect 244x228 smd: 2(0,0)
  silkscreen extent -140,-150 374,150, body extent -90,-129 304,130, height 94
VMCG20 [mm]
  Keep-Out Layer board cut-out: -2.8,2 -2.8,2 -2.8,2 -2.8,2 -2.75,2.3 -2.6,2.55 -2.45,2.7 -2.25,2.8 -2,2.8 2,2.8 2.4,2.7 2.65,2.45 2.75,2.25 2.8,2 2.8,0.8 3.05,0.75 3.3,0.6 3.5,0.4 3.6,0.15 3.6,-0.05 3.55,-0.35 3.45,-0.5 3.2,-0.7 2.8,-0.8 2.8,-2 2.75,-2.3 2.6,-2.55 2.4,-2.7 2,-2.8 -2,-2.8 -2.3,-2.75 -2.55,-2.6 -2.7,-2.4 -2.8,-2 -2.8,-0.8 -3.05,-0.75 -3.35,-0.6 -3.55,-0.35 -3.6,0 -3.6,0.2 -3.45,0.5 -3.05,0.75 -2.8,0.8
  Keep-Out Layer lines w0.2: 2,2.8 cw(c2,2) 2.8,2 2.8,0.8 cw(c2.8,0) 2.8,-0.8 2.8,-2 cw(c2,-2) 2,-2.8 -2,-2.8 cw(c-2,-2) -2.8,-2 -2.8,-0.8 cw(c-2.8,0) -2.8,0.8 -2.8,2 cw(c-2,2) -2,2.8 2,2.8
  silkscreen extent -4,-6.7 4,8.5, body extent -4,-6.7 4,8.5, height 21.5
Wago233-204 [mm]
  round 2 hole 1: 1(-3.75,2.5) 2(-3.75,-2.5) 3(-1.25,2.5) 4(-1.25,-2.5) 5(1.25,2.5) 6(1.25,-2.5) 7(3.75,2.5) 8(3.75,-2.5)
  silkscreen extent -5.85,-4.9 6.45,7.42, body extent -5.85,-4.9 6.45,7.42, height 16.45
WAGO256-401x3 [mm]
  round 2.5 hole 1.2: 1(0,0) 2(0,-5) 3(5,0) 4(5,-5) 5(10,0) 6(10,-5)
  silkscreen extent -4.15,-10 13.75,5.03, body extent -4.15,-10 13.75,5.03, height 18.81
WF02S [mil]
  rect 70x70 hole 40: 1(0,0)
  round 70 hole 40: 2(100,0)
  silkscreen extent -75,-125 150,115, body extent -50,-125 150,115, height 453
WF03S [mil]
  rect 70x70 hole 40: 1(0,0)
  round 70 hole 40: 2(100,0) 3(200,0)
  silkscreen extent -60,-125 250,115, body extent -50,-125 270,115, height 453
WF04S [mil]
  rect 70x70 hole 40: 1(0,0)
  round 70 hole 40: 2(100,0) 3(200,0) 4(300,0)
  silkscreen extent -60,-125 350,115, body extent -50,-125 350,115, height 453

## Part data
B1u: library part 300mA/60V[[/\]]SL030-60[[/\]]2920
C1c C6u C7u C8u C9u C15c: library part C0805C105K4RAC[[/\]]0805[[/\]]16V[[/\]]10%[[/\]]1u/16V
C1o C6c C7c: library part "CL21C220JBANNNC[[/\]]0805[[/\]]50V[[/\]]5%[[/\]]22p/50V 5%"
C1u: library part SD1V107M6L011BB[[/\]]CE1028[[/\]]35V[[/\]]20%[[/\]]100u/35V
C2c: library part CL21B103KBANNNC[[/\]]0805[[/\]]50V[[/\]]10%[[/\]]10n/50V
C2o C2u C3o C3u C4c C4o C4u C5c C5u C8c C9c C10c C11c C12c C13c C14c C16c: library part CL21B104KBCNNNC[[/\]]0805[[/\]]50V[[/\]]10%[[/\]]100n/50V
C3c: library part CL31B475KPHNNNE[[/\]]1206[[/\]]10V[[/\]]10%[[/\]]4u7/10V
D1 D2 D4 D5: library part P6SMB15A[[/\]]SMB
D1c: library part OF-SMD2012R[[/\]]D0805
D1o D1u: library part 10MQ040N[[/\]]SMA
D1r D2r: library part 1N4148-0805[[/\]]D0805
D2c: library part KPA-3010SURCK[[/\]]KPA-3010SURCK
D3: library part P6SMB33CA[[/\]]SMB
D3c: library part KPA-3010SYCK[[/\]]KPA-3010SYCK
D4c: library part KPA-3010CGCK[[/\]]KPA-3010CGCK
D5c: library part KPA-3010QBC-D[[/\]]KPA-3010QBC-D
FIT1 FIT2 FIT3 FIT4: library part VMCG20[[/\]]VMCG20
J1: library part LPGCODetA1[[/\]]LPGCODetA1
J1c: library part WF03S[[/\]]WF03S
J2 J3 J6 J7: library part Wago256-401x3[[/\]]15x15
J2c J4c J5c: library part JUMPERx2[[/\]]2.54mm
J3c: library part PLMS4S[[/\]]4x2mm
J4 J5: library part Wago233-204[[/\]]13.9x12.3
J8: library part WF02S[[/\]]WF02S
J9: library part WF04S[[/\]]WF04S
L1u: library part CAX-0.4-39[[/\]]17.8x12.8x20[[/\]]CAX-0.4-39
L2u L3u: library part BLM31P500SPT[[/\]]1206[[/\]]BLM31P500SPT
LETTER1 LETTER9 LETTER17 LETTER25: library part LETTERC_L[[/\]]LETTER_L
LETTER2 LETTER10 LETTER18 LETTER26: library part LETTERC_P[[/\]]LETTER_P
LETTER3 LETTER11 LETTER19 LETTER27: library part LETTERC_G[[/\]]LETTER_G
LETTER4 LETTER12 LETTER20 LETTER28: library part LETTERC_D[[/\]]LETTER_D
LETTER5 LETTER13 LETTER21 LETTER29: library part LETTER_E[[/\]]LETTER_E
LETTER6 LETTER14 LETTER22 LETTER30: library part LETTER_T[[/\]]LETTER_T
LETTER7 LETTER15 LETTER23 LETTER31: library part LETTERC_A[[/\]]LETTER_A
LETTER8 LETTER16 LETTER24 LETTER32: library part LETTER_1[[/\]]LETTER_1
LOGO1 LOGO2 LOGO3 LOGO4: library part MRQ_2_8[[/\]]MRQLOGO
LOGO5 LOGO6 LOGO7 LOGO8: library part KATechnologyLogo[[/\]]KATECHLOGO
M1: library part LPGDetAUX[[/\]]LPGDetAUX
PAD1 PAD2 PAD3 PAD4: library part PAD3_2MM[[/\]]PAD3_2MM
R1 R2: library part "0805WAJ 3K3 T5E[[/\]]0805[[/\]]0.125W[[/\]]5%[[/\]]3k3"
R1c R10c R12o: library part "0805WAF10KT5E[[/\]]0805[[/\]]0.125W[[/\]]1%[[/\]]10k 1%"
R1o R5o: library part "0805WAF 100K T5E[[/\]]0805[[/\]]0.125W[[/\]]1%[[/\]]100k 1%"
R1u R6c R7o R8o: library part "0805WAJ 0R T5E[[/\]]0805[[/\]]0.125W[[/\]]0.1R[[/\]]0R"
R2c R3c R4c R5c R7c: library part "0805WAF 220R T5E[[/\]]0805[[/\]]0.125W[[/\]]1%[[/\]]220R 1%"
R2o R6o: library part "0805WAF 2K4 T5E[[/\]]0805[[/\]]0.125W[[/\]]1%[[/\]]2k4 1%"
R2u: library part "0805WAF 200R T5E[[/\]]0805[[/\]]0.125W[[/\]]1%[[/\]]200R 1%"
R3o R4o R10o: library part "0805WAF 30R T5E[[/\]]0805[[/\]]0.125W[[/\]]1%[[/\]]30R 1%"
R3u: library part "0805WAF 120R T5E[[/\]]0805[[/\]]0.125W[[/\]]1%[[/\]]120R 1%"
R8c R9o: library part "0805WAJ 100K T5E[[/\]]0805[[/\]]0.125W[[/\]]5%[[/\]]100k"
R9c: library part "0805WAJ 510R T5E[[/\]]0805[[/\]]0.125W[[/\]]5%[[/\]]510R"
R11c: library part "0805WAJ 120R T5E[[/\]]0805[[/\]]0.125W[[/\]]5%[[/\]]120R"
R11o: library part "0805WAF 30K T5E[[/\]]0805[[/\]]0.125W[[/\]]1%[[/\]]30k 1%"
R13o: library part "0805WAJ 300R T5E[[/\]]0805[[/\]]0.125W[[/\]]5%[[/\]]300R"
RE1r RE2r: library part RM699BV-3011-85-1005[[/\]]28x5x15
REF1: library part REF_CIR[[/\]]REF_CIR, "Punkt referencyjny dla  p³yty u¿ywany przez FLX2010"
REF2: library part REF_REC[[/\]]REF_REC, "Punkt referencyjny dla  p³yty u¿ywany przez FLX2010"
SW1c SW1o: library part DTS63K[[/\]]DTS63K[[/\]]6x6
T1 T1r T2r: library part 2N7002PW[[/\]]SOT323-3
U1c: library part STM32F100C8T6B[[/\]]MS-026ABC
U1o: library part LM258D[[/\]]8SOIC150
U1u: library part 78M09CDT[[/\]]TO-252
U2c: library part ST3232CD[[/\]]16SOIC150, "DUAL EIA-232 DRIVER/RECEIVER"
U2o: library part MCP6L71T-E/OT[[/\]]SOT23-5
U2u: library part L7805ACD2T[[/\]]D2PAK
U3c: library part ST3485EB[[/\]]8SOIC150
U3u: library part MCP1700T3302ETT[[/\]]SOT23-3
U4c: library part REF2933AIDBZT[[/\]]SOT23-3
U4u: library part ZLDO1117KTC[[/\]]TO-252
X1c: library part "12SMX (B) 30/5020/16 8.0 MHZ[[/\]]HC49SMP[[/\]]8MHz"

## Via types
v1: diameter 1.1, hole 0.6, Top Layer to Bottom Layer, 80 vias
v2: diameter 1.27, hole 0.711, Top Layer to Bottom Layer, 1 vias

## Nets (pads, with @x,y where several pads share a name; then routed paths per layer and width w, separated by ;. In a path a pad name is that pad's centre, name@x,y a point inside that pad or via, vN(x,y) a via of type N, cw(c..) or ccw(c..) an arc to the next point about the centre after c; other vN are vias at no path point)
+2V: C9u.1 J1.7 R2u.1 U4u.2 | length 49.9
  Top Layer w0.5: C9u.1 -35.9,24.5 U4u.2 -25.6,23 -23.72,24.88 R2u.1 -23.5,25.2 -21.1,27.6 -21.1,30.7 -15.9,35.9 v1(-9,35.9)
  Bottom Layer w0.5: v1(-9,35.9) -4.774,35.9 J1.7
+3V3: C3c.1 C4c.1 C4o.1 C5c.1 C7u.1 C8c.2 C12c.1 J1.6 R2c.2 R3c.2 R4c.2 R5c.2 R6c.2 R8c.1 R9c.1 SW1o.3 SW1o.4 U1c.24 U1c.36 U1c.48 U2c.16 U2o.5 U3c.8 U3u.2 | length 246.9
  Top Layer w0.25: C3c.1@3.7,21.9 U1c.24@6.25,21.9 ; U1c.24 12.45,21.95 v1(13.5,23) 13.5,26.6 14.35,27.45 U1c.48 C5c.1@17.976,27.45
  Top Layer w0.4: C12c.1 -33.665,39.815 U2c.16 v1(-31.4,37.1) ; SW1o.3 -16.65,32.85 -19.2,30.3 -19.2,19.7 -17.4,17.9 C4o.1 ; U2o.5@-14.05,20.3 C4o.1 ; U3u.2 -9.25,13.355 C7u.1 -9.25,15.05 -10.6,16.4 -13.7,16.4 -14.05,16.75 C4o.1 ; SW1o.4 -6.468,30.268 R2c.2 ; C4c.1@13.7,17.35 13.7,19 ; U1c.36@13.7,20.05 13.7,19 ; v1(14.9,19) 13.7,19 ; U3c.8 24.935,12.485 C8c.2 ; v1(23,23) 23,20.8 25,18.8 v1(25,16.8) ; v1(23,28.4) 23,35.9 23.621,36.521 R8c.1 ; v1@23.12,28.52 R9c.1 ; v1(32.3,24.9) 36.6,24.9 37.7,26 47.3,26 v1(48,25.3) 47.28,24.58 R3c.2 ; R5c.2 47.3,7.4 v1(48.6,7.4) ; R4c.2 47.259,15.4 v1(48.6,15.4) ; R6c.2 48.579,-0.62 v1(48.6,-0.6)
  Bottom Layer w0.4: v1(-31.4,37.1) -29.5,37.1 -25.25,32.85 SW1o.3 SW1o.4 -5.35,32.85 2.555,40.755 J1.6 4.466,42.6 18.7,42.6 23,38.3 v1(23,28.4) v1(23,23) v1(13.5,23) 13.5,20.4 v1(14.9,19) ; v1(23.4,12.5) 23.4,13.2 25,14.8 v1(25,16.8) 25,17.6 v1(32.3,24.9) ; v1(48,25.3) 50.4,22.9 50.4,17.2 v1(48.6,15.4) v1(48.6,7.4) v1(48.6,-0.6)
+3VREF: C1c.1 C2c.1 C16c.1 U1c.9 U4c.2 | length 12.3
  Top Layer w0.25: U4c.2 2.471,32.32 C16c.1 3.359,33.05 C1c.1 C2c.1 9.65,32.3 U1c.9
+5V: C5u.1 C6u.1 C8u.1 C15c.1 D1r.CATH D2r.CATH J1.5 J8.1 J9.1 M1.2 R8o.1 RE1r.2 RE2r.2 U2u.3 U3u.3 U4c.1 U4u.3 | length 299.6
  Top Layer w0.5: C15c.1@-2.37,32.32 U4c.1
  Top Layer w1: J9.1 -39.4,20 -38,18.6 -38,7.6 v1(-39.2,6.4) -39.2,2 -42,-0.8 -42,-24.264 RE2r.2 -39.332,-25.586 D2r.CATH ; v1(-29.1,28) -29,28.1 C8u.1 -26.979,26.6 ; U4u.3@-26.979,25.29 -26.979,26.6 ; U2u.3 -21.4,12.3 C5u.1 -17.25,10.45 v1(-16.9,10.1) -11.932,10.1 ; U3u.3 -11.932,10.1 ; v1(-9.1,4.9) -11.95,7.45 C6u.1 -11.932,8.418 -11.932,10.1 ; v1(-0.2,36.3) -1.3,35.2 -1.3,34.3 -2.55,33.05 C15c.1 -3.35,33.05 -7.7,37.4 -16.2,37.4 -22.4,31.2 -22.4,27.9 -23.7,26.6 -26.979,26.6 ; J1.5 7.006,42.6 19.7,42.6 22.8,39.5 26.1,39.5 27,40.4 44.4,40.4 47,37.8 J8.1 ; v1(10.9,4.9) 11.3,5.2 R8o.1 ; D1r.CATH 45.502,-16.988 RE1r.2
  Bottom Layer w0.5: J8.1 48.5,33.7 49.3,32.9 49.3,28.7 51.3,26.7 51.3,15.8 49.8,14.3 49.8,-14.94 RE1r.2
  Bottom Layer w1: M1.2 -44.85,6.4 v1(-39.2,6.4) -35.5,10.1 v1(-16.9,10.1) ; J9.1 -33.9,23.3 -29.2,28 v1(-29.1,28) ; v1(-9.1,4.9) v1(10.9,4.9) ; v1(-0.2,36.3) 0.706,36.3 J1.5
+9V: C3u.1 C4u.1 R1u.2 R7o.2 U1u.3 U2u.1 | length 46.7
  Top Layer w0.5: R1u.2 -14.55,0.45 v1(-11.3,3.7) ; v1@8.509,3.509 R7o.2
  Top Layer w1: U2u.1 -17.41,7.26 C4u.1 C3u.1 -17.25,0.6 R1u.2 ; U1u.3 R1u.2@-17.836,1.186 ; v1(8.5,3.5) v1@8.509,3.509
  Bottom Layer w0.5: v1(-11.3,3.7) -11.1,3.5 v1(8.5,3.5)
+24V: C1u.2 C2u.1 D1u.CATH R1u.1 U1u.1 | length 21.9
  Top Layer w1: U1u.1 -20.167,-2.37 C1u.2 ; C2u.1 -17.25,-2.4 R1u.1 ; v1(-6.6,0.1) -5.941,0.759 D1u.CATH
  Bottom Layer w1: C1u.2 -9.07,-2.37 v1(-6.6,0.1)
AUX0: M1.8 U1c.26 | length 71.1
  Top Layer w0.25: v1(-5.9,20.6) -4.8,20.6 -3.8,19.6 6.9,19.6 7.7,18.8 8.2,18.8 8.65,19.25 U1c.26
  Bottom Layer w0.25: M1.8 -41.99,-8.79 -30.6,2.6 -17.8,2.6 -11.9,8.5 -11.9,10.6 -5.9,16.6 v1(-5.9,20.6)
BOOT0: J5c.2 R10c.2 U1c.44 | length 17.8
  Top Layer w0.25: U1c.44 26.95,25.45 v1(27.4,25) ; J5c.2@27.46,28.22 R10c.2
  Bottom Layer w0.25: v1(27.4,25) J5c.2
C-IN: L3u.2 R9o.2 R10o.1 R13o.2 | length 83.1
  Top Layer w0.5: v1(-17.2,26.6) R13o.2 R9o.2 R10o.1 ; v1(19.9,-10.1) 19.9,-13.797 L3u.2
  Bottom Layer w0.5: v1(-17.2,26.6) -17.2,29.8 -16.9,30.1 -6.5,30.1 -3.2,26.8 -3.2,18.1 2.9,12 2.9,8.5 2.4,8 2.4,6.8 3.1,6.1 12.8,6.1 19.9,-1 v1(19.9,-10.1)
C-OUT: C2o.2 D1o.CATH L2u.2 | length 30.2
  Top Layer w0.5: L2u.2 -9.6,-13.6 -7.8,-11.8 -7.8,1.3 -6.3,2.8 -4.6,2.8 -2.6,4.8 D1o.CATH C2o.2
COMREL1: J2.3 J2.4 RE1r.11 | length 19
  Top Layer w1.5: J2.3 J2.4 38.194,-40.406 45.232,-33.368 RE1r.11
COMREL2: J3.3 J3.4 RE2r.11 | length 17.2
  Top Layer w1.5: RE2r.11 -34.739,-42.639 -32.3,-40.2 J3.4 J3.3
CURR-SOURCE-IN: R11o.1 U1c.19 U2o.1 | length 20.9
  Top Layer w0.25: U2o.1 -8.729,20.35 R11o.1 -6.4,22.421 -6.4,23.3 -4.1,25.6 3.4,25.6 4.55,24.45 U1c.19
CURR-SOURCE-OUT: U1c.14 U1o.5 | length 41.2
  Top Layer w0.25: v1(2.5,31) 6,31 6.7,30.3 v1(6.6,30.3) ; v1(3.6,7.3) 4.325,7.3 U1o.5 ; U1c.14 7.55,26.95 v1(8.1,27.5)
  Bottom Layer w0.25: v1(2.5,31) 1.2,31 -2.5,27.3 -2.5,18.4 3.6,12.3 v1(3.6,7.3) ; v1(6.6,30.3) 8.1,28.8 v1(8.1,27.5)
DIN: M1.7 U1c.25 | length 69.1
  Top Layer w0.25: v1(-6.9,19.5) -6.9,21 -6.2,21.7 -5,21.7 -3.4,20.1 U1c.25
  Bottom Layer w0.25: M1.7 -41.05,-6.25 -31.6,3.2 -18.2,3.2 -12.6,8.8 -12.6,11.1 -6.9,16.8 v1(-6.9,19.5)
GAS-CONC: J1.3 U1c.10 | length 12.4
  Top Layer w0.25: v1(8.6,31) 8.9,30.7 9.15,30.45 U1c.10
  Bottom Layer w0.25: v1(8.6,31) 8.6,39.114 J1.3
GND: C1c.2 C1u.1 C2c.2 C2o.1 C2u.2 C3c.2 C3o.2 C3u.2 C4c.2 C4o.2 C4u.2 C5c.2 C5u.2 C6c.1 C6u.2 C7c.1 C7u.2 C8c.1 C8u.2 C9c.2 C9u.2 C11c.2 C12c.2 C14c.2 C15c.2 C16c.2 J1.1 J1.2 J1.8 J1c.3 J3c.3 J9.2 L1u.5 L1u.6 M1.1 R1c.2 R1o.2 R3u.2 R10c.1 R10o.2 R12o.2 SW1c.1 SW1c.2 T1.2 T1r.2 T2r.2 U1c.8 U1c.23 U1c.35 U1c.47 U1o.4 U1u.2 U2c.15 U2o.2 U2u.2 U3c.5 U3u.1 U4c.3 | length 23.2
  Top Layer w0.25: C3c.2 1.421,22.45 U1c.23 7.85,22.45 ; 10.15,27.55 U1c.8 10.15,30.85 ; U1c.35 13.15,18.95 12.8,18.6 12.8,16.15 C4c.2 ; U1c.47 19.8,26.95 C5c.2@20.75,27.9
  other v1: 19.8,8.4 27.3,8.5 1.6,9.4 15.5,12.3 -1.9,13.2 9.9,13.2 27.4,13.2 -1.9,15 16.8,18.2 8.4,23.3 11.8,23.4 8.4,25.7 11.8,26.6 -5.4,37.5 -24,37.7 -17.7,38.2
GOOD-WORK: D1c.CATH R1c.1 U1c.20 | length 13.1
  Top Layer w0.25: D1c.CATH 0.48,30.033 0.48,29 ; R1c.1 0.48,29 ; v1(1.2,24.6) 1.4,24.6 2.05,23.95 U1c.20 ; v1(1.5,29) 0.48,29
  Bottom Layer w0.25: v1(1.2,24.6) 1.2,28.7 v1(1.5,29)
LEDB: D5c.CATH U1c.41 | length 56.8
  Top Layer w0.25: U1c.41 24.05,23.95 25.3,22.7 41.8,22.7 44.7,22.7 v1(45.5,21.9) ; v1(45.5,1.5) 49.95,1.5 D5c.CATH
  Bottom Layer w0.25: v1(45.5,1.5) v1(45.5,21.9)
LEDG: D4c.CATH U1c.42 | length 49.2
  Top Layer w0.25: U1c.42 24.65,24.45 25.8,23.3 45.5,23.3 v1(45.6,23.4) ; v1(47.1,9.3) 50.15,9.3 D4c.CATH
  Bottom Layer w0.25: v1(45.6,23.4) 47.1,21.9 v1(47.1,9.3)
LEDR: D2c.CATH U1c.45 | length 36.4
  Top Layer w0.25: U1c.45 35.6,25.95 36.45,26.8 48.65,26.8 D2c.CATH
LEDY: D3c.CATH U1c.43 | length 42
  Top Layer w0.25: U1c.43 25.25,24.95 26.3,23.9 38.1,23.9 38.9,24.7 v1(44.8,24.7) ; v1(48.6,17.3) 50.15,17.3 D3c.CATH
  Bottom Layer w0.25: v1(44.8,24.7) 45.9,24.7 48.6,22 v1(48.6,17.3)
NCREL1: J2.1 J2.2 RE1r.12 | length 19
  Top Layer w1.5: J2.1 J2.2 38.594,-35.406 45.672,-28.328 RE1r.12
NCREL2: J3.5 J3.6 RE2r.12 | length 17.2
  Top Layer w1.5: RE2r.12 -35.299,-37.599 -32.9,-35.2 J3.6 J3.5
NetB1u_1: B1u.1 D1u.ANOD | length 11.8
  Top Layer w1: D1u.ANOD -1.786,-6.3 3.2,-6.3 4.7,-7.8 B1u.1
NetB1u_2: B1u.2 L1u.7 L1u.8 | length 10
  Top Layer w1.5: L1u.7 -0.3,-1.4 ; L1u.8 -0.3,-1.4 ; B1u.2 -0.3,-1.4
NetC1o_1: C1o.1 R1o.1 R2o.1 U1o.2 | length 20
  Top Layer w0.25: v1(-7.3,11.5) -7.3,13 -6.2,14.1 C1o.1 ; U1o.2 1.13,10.83 v1(1.78,11.48) R1o.1 R2o.1
  Bottom Layer w0.25: v1(-7.3,11.5) -7.28,11.48 v1(1.78,11.48)
NetC1o_2: C1o.2 R3o.1 R4o.2 U1o.1 | length 8.3
  Top Layer w0.25: R3o.1 -5.62,16.2 C1o.2 R4o.2 -3.42,12.1 U1o.1
NetC3o_1: C3o.1 R7o.1 R8o.2 U1o.8 | length 8.7
  Top Layer w0.25: C3o.1 5.25,12.165 U1o.8 7.969,12.1 8.519,11.55 R8o.2
NetC7c_2: C7c.2 R7c.1 X1c.2 | length 6.6
  Top Layer w0.25: C7c.2 11.535,37.744 R7c.1 13.852,34.796 X1c.2 X1c.2@14.52,34.107
NetC9c_1: C9c.1 U2c.2 | length 5.7
  Top Layer w0.25: C9c.1 -32.75,35.9 -30.7,35.9 -30.13,35.33 U2c.2
NetC10c_1: C10c.1 U2c.1 | length 3.4
  Top Layer w0.25: C10c.1 -32.05,33.35 -31.4,34 U2c.1
NetC10c_2: C10c.2 U2c.3 | length 3.3
  Top Layer w0.25: C10c.2 -29.35,32.15 -28.86,32.64 U2c.3
NetC11c_1: C11c.1 U2c.6 | length 7.3
  Top Layer w0.25: U2c.6 -25.05,35.85 -24.35,36.55 C11c.1
NetC13c_1: C13c.1 U2c.4 | length 3.4
  Top Layer w0.25: U2c.4 -27.59,32.29 -26.85,31.55 C13c.1
NetC13c_2: C13c.2 U2c.5 | length 4.1
  Top Layer w0.25: U2c.5 -26.32,33.02 -24.3,31 C13c.2
NetD1c_ANOD: D1c.ANOD R2c.1 | length 2.5
  Top Layer w0.25: R2c.1 D1c.ANOD
NetD1o_ANOD: D1o.ANOD R4o.1 R6o.2 | length 10
  Top Layer w0.25: R4o.1 R6o.2 -6.8,9.9 -7.3,9.4 -7.3,5.2 -6.9,4.8 D1o.ANOD
NetD1r_ANOD: D1r.ANOD RE1r.1 T1r.3 | length 7.1
  Top Layer w0.5: D1r.ANOD 45.392,-13.208 RE1r.1 47.7,-13.156 T1r.3
NetD2c_ANOD: D2c.ANOD R3c.1 | length 3.5
  Top Layer w0.25: R3c.1 47.39,21.25 D2c.ANOD
NetD2r_ANOD: D2r.ANOD RE2r.1 T2r.3 | length 6.9
  Top Layer w0.5: T2r.3 -40.005,-18.83 RE2r.1 -37.921,-22.479 D2r.ANOD
NetD3c_ANOD: D3c.ANOD R4c.1 | length 3.5
  Top Layer w0.25: R4c.1 47.25,13.25 D3c.ANOD
NetD4c_ANOD: D4c.ANOD R5c.1 | length 3.5
  Top Layer w0.25: R5c.1 47.31,5.25 D4c.ANOD
NetD5c_ANOD: D5c.ANOD R6c.1 | length 3.4
  Top Layer w0.25: R6c.1 47.39,-2.75 D5c.ANOD
NetJ1c_1: J1c.1 U2c.13 | length 10.3
  Top Layer w0.25: v2(-27.6,37.8) -27.59,37.81 U2c.13
  Bottom Layer w0.25: J1c.1 -29.1,39.3 v2(-27.6,37.8)
NetJ1c_2: J1c.2 U2c.14 | length 6.6
  Top Layer w0.25: U2c.14 -28.86,42.04 -26.56,44.34 J1c.2
NetJ2c_1: J2c.1 R11c.1 | length 2.5
  Top Layer w0.5: R11c.1@41.25,18 J2c.1
NetJ4c_1: J4c.1 R11c.2 | length 2.4
  Top Layer w0.5: R11c.2@41.35,15.4 J4c.1
NetJ5c_1: J5c.1 R9c.2 | length 2.7
  Top Layer w0.25: R9c.2 24.721,30.7 J5c.1
NetJ8_2: J8.2 T1.3 | length 3.8
  Top Layer w0.25: T1.3 45.84,30 J8.2
NetJ9_3: J9.3 R1.1 | length 11.6
  Top Layer w0.25: R1.1 -43.7,26.1 -41.42,28.38 J9.3
NetJ9_4: J9.4 R2.1 | length 12.3
  Top Layer w0.25: v1(-41.6,22.7) -41.6,20.38 R2.1
  Bottom Layer w0.25: v1(-41.6,22.7) -41.6,28.72 J9.4
NetR2o_2: R2o.2 R3o.2 | length 3.2
  Top Layer w0.25: R3o.2 -3.32,16.4 R2o.2
NetR2u_2: R2u.2 R3u.1 U4u.1 | length 5.7
  Top Layer w0.25: U4u.1 R3u.1@-23.494,20.714 ; R2u.2 -23.5,20.72 R3u.1
NetR5o_1: R5o.1 R6o.1 U1o.3 | length 6.3
  Top Layer w0.25: R5o.1 -3.58,9.9 R6o.1 -3.18,9.56 U1o.3
NetR5o_2: R5o.2 U1o.6 U1o.7 | length 11.6
  Top Layer w0.25: R5o.2 -2.9,7.8 -2.4,7.3 1.9,7.3 3.2,8.6 3.2,9.2 3.56,9.56 U1o.6 U1o.7
NetR9o_1: R9o.1 U2o.3 | length 2.3
  Top Layer w0.25: U2o.3 -11.221,22.33 R9o.1
NetR11o_2: R11o.2 R12o.1 U2o.4 | length 15.9
  Top Layer w0.25: v1(-18.2,22.3) -16.421,22.3 R12o.1 -14.129,22.28 U2o.4 ; R11o.2 v1(-8.6,23.9)
  Bottom Layer w0.25: v1(-18.2,22.3) -16.6,23.9 v1(-8.6,23.9)
NetR13o_1: R13o.1 SW1o.1 SW1o.2 | length 8.1
  Top Layer w0.25: SW1o.1 -12.15,28.35 -11.221,27.42 ; R13o.1 -11.221,27.42 ; SW1o.2 -10.291,28.35 -11.221,27.42
NOREL1: J2.5 J2.6 RE1r.14 | length 19
  Top Layer w1.5: J2.5 J2.6 38.594,-45.406 45.592,-38.408 RE1r.14
NOREL2: J3.1 J3.2 RE2r.14 | length 17.2
  Top Layer w1.5: RE2r.14 -34.379,-47.679 -31.9,-45.2 J3.2 J3.1
NRST: C14c.1 R8c.2 SW1c.3 SW1c.4 U1c.7 | length 40.2
  Top Layer w0.25: U1c.7 10.65,28.35 10.9,28.1 14.1,28.1 16.5,30.5 21.6,30.5 22.3,31.2 22.3,37.2 23.4,38.3 28.479,38.3 28.83,38.65 SW1c.3 SW1c.4
OFFSET-ADJ: J1.4 U1c.15 | length 18.3
  Top Layer w0.25: v1(3.8,26.7) 4.05,26.45 U1c.15
  Bottom Layer w0.25: v1(3.8,26.7) 3.8,29.1 7.701,33.001 J1.4
OSC_IN: C6c.2 U1c.5 X1c.1 | length 17
  Top Layer w0.25: U1c.5 11.65,30.85 13.1,32.3 16.3,32.3 17.5,33.5 17.5,36 18.118,36.618 X1c.1 20.743,36.63 C6c.2
OSC_OUT: R7c.2 U1c.6 | length 3.5
  Top Layer w0.25: U1c.6 11.15,32.252 R7c.2
PIEZO: T1.1 U1c.46 | length 28.1
  Top Layer w0.25: U1c.46 32.95,26.45 37.15,30.65 T1.1
REL1: T1r.1 U1c.33 | length 56.3
  Top Layer w0.25: U1c.33 12.15,13.35 20.3,5.2 20.3,-1.2 22.8,-3.7 42.8,-3.7 44.3,-5.2 47.5,-5.2 48.35,-6.05 T1r.1
REL2: T2r.1 U1c.27 | length 73.7
  Top Layer w0.25: T2r.1@-39.4,-16.925 v1(-39.4,-10.1) ; v1(-4.9,19.3) -4.6,19 4.3,19 4.6,18.7 7.1,18.7 7.5,18.3 8.4,18.3 9.15,19.05 U1c.27
  Bottom Layer w0.25: v1(-39.4,-10.1) -39.4,-7.7 -29.8,1.9 -17.3,1.9 -11.1,8.1 -11.1,10.3 -4.9,16.5 v1(-4.9,19.3)
RS232-RX: U1c.31 U2c.12 | length 69.1
  Top Layer w0.25: U2c.12 -26.32,41.88 -25.5,42.7 -18.3,42.7 -14.9,39.3 -3,39.3 -2,38.3 5,38.3 v1(5.2,38.5) ; v1@10.4,16.1 v1(10.3,16.1) 11.15,16.95 U1c.31
  Bottom Layer w0.25: v1(5.2,38.5) 4.8,38.1 4.8,31.7 2.4,29.3 2.4,20.6 6,17 9.2,17 10.1,16.1 v1(10.3,16.1)
RS232-TX: U1c.30 U2c.11 | length 65.4
  Top Layer w0.25: U2c.11 -25.05,41.45 -24.5,42 -19.5,42 -16.3,38.8 -4.6,38.8 -3.2,37.4 6,37.4 v1(6.7,38.1) ; v1(9.9,17.7) 10.65,18.45 U1c.30
  Bottom Layer w0.25: v1(6.7,38.1) 6.4,38.1 5.3,37 5.3,31.4 2.9,29 2.9,21.5 6.7,17.7 v1(9.9,17.7)
RS485-APLUS: D2.CATH J2c.2 J4.3 J4.4 J5.3 J5.4 U3c.6 | length 55.4
  Top Layer w0.5: U3c.6 19.96,13.56 21.3,14.9 26.25,14.9 29.4,18.05 J5.3 J5.4 40.69,20.54 J2c.2 ; D2.CATH J4.3@33.15,4.8 ; J4.3 J4.4
  Bottom Layer w0.5: J4.4 39.65,4.75 40.9,6 40.9,16.9 39.75,18.05 J5.4
RS485-BMINUS: D1.CATH J4.5 J4.6 J4c.2 J5.5 J5.6 U3c.7 | length 71.8
  Top Layer w0.5: U3c.7 21.23,0.07 21.5,-0.2 D1.CATH 23.5,-1.9 24.3,-2.7 39.5,-2.7 40.4,-1.8 40.4,1.3 39.45,2.25 J4.6 J4.5 ; J5.5 J5.6 38.25,15.55 40.94,12.86 J4c.2
  Bottom Layer w0.5: J4.6 42.45,2.25 43.7,3.5 J4c.2
RS485-DE: U1c.39 U3c.3 | length 8.9
  Top Layer w0.25: U1c.39 19.45,22.95 19.96,22.44 U3c.3
RS485-RE: U1c.40 U3c.2 | length 10.7
  Top Layer w0.25: U1c.40 20.75,23.45 21.23,22.97 U3c.2
RS485-RX: U1c.22 U3c.1 | length 40.3
  Top Layer w0.25: v1(-1.6,22.9) -1.55,22.95 U1c.22 ; v1(16.8,14.2) 19.2,14.2 22.5,17.5 U3c.1
  Bottom Layer w0.25: v1(-1.6,22.9) -1.6,18.5 2.7,14.2 v1(16.8,14.2)
RS485-TX: U1c.21 U3c.4 | length 36.8
  Top Layer w0.25: v1(-0.7,24.4) 0.25,23.45 U1c.21 ; U3c.4 18.69,16.11 v1(18.7,16.1)
  Bottom Layer w0.25: v1(-0.7,24.4) -0.7,18.3 2.2,15.4 2.6,15 13.1,15 14.2,16.1 v1(18.7,16.1)
S-IN: D4.CATH J7.3 J7.4 L3u.1 | length 14.2
  Top Layer w1: L3u.1 22.797,-13.9 D4.CATH 27,-13.5 J7.3 J7.4
S-OUT: D5.CATH J6.3 J6.4 L2u.1 | length 16.5
  Top Layer w1: J6.4 J6.3 L2u.1 -16.397,-17.603 D5.CATH
SCLK: M1.6 U1c.28 | length 67.8
  Top Layer w0.25: v1(-7.8,18.3) 3.3,18.3 3.9,17.7 8.5,17.7 9.65,18.85 U1c.28
  Bottom Layer w0.25: M1.6 -39.61,-3.71 -32,3.9 -18.5,3.9 -13.1,9.3 -13.1,11.7 -7.8,17 v1(-7.8,18.3)
SUPP-NEG: D1.ANOD D2.ANOD D3.ANOD D4.ANOD D5.ANOD J4.7 J4.8 J5.7 J5.8 J6.1 J6.2 J7.5 J7.6 L1u.3 L1u.4 | length 142.3
  Top Layer w1.5: J6.2 J6.1 -20.9,-21.5 -13.4,-21.5 -12.084,-20.184 D5.ANOD 5.7,-17.7 L1u.4 ; D3.ANOD 9.965,-8.435 L1u.3 L1u.4 ; D2.ANOD 27.716,0.667 D1.ANOD 27.766,-0.25 J4.7 J4.8 ; J5.7 J5.8 ; J7.6 J7.5 26.984,-18.5 D4.ANOD 14.116,-18.116 L1u.4
  Bottom Layer w1.5: J4.7 31.85,-0.25 30.8,0.8 30.8,10.65 J5.7 ; J7.6 38.3,-18.5 39.6,-17.2 39.6,-1.65 J4.8
SUPP-POS: D3.CATH J4.1 J4.2 J5.1 J5.2 J6.5 J6.6 J7.1 J7.2 L1u.1 L1u.2 | length 118.7
  Top Layer w1.5: J6.6 J6.5 ; L1u.1 L1u.2 10.165,-4.165 D3.CATH 20.4,-4.165 24.735,-8.5 J7.1 J7.2 ; J4.1 J4.2 ; J5.1 J5.2
  Bottom Layer w1.5: J6.5 -6.5,-8.6 -3.8,-5.9 7.5,-5.9 L1u.2 ; J7.1 35.7,-4.5 35.7,6.1 33.875,7.925 35.7,9.75 35.7,19.7 36.55,20.55 J5.2
SWCLK: J3c.2 U1c.37 | length 21.2
  Top Layer w0.25: U1c.37 17.95,21.95 v1(18.1,21.8)
  Bottom Layer w0.25: v1(18.1,21.8) 23.8,21.8 26,24 26,33.3 J3c.2
SWDIO: J3c.4 U1c.34 | length 29.4
  Top Layer w0.25: U1c.34 12.65,21.05 13,21.4 14.1,21.4 14.9,20.6 v1(17,20.6)
  Bottom Layer w0.25: v1(17,20.6) 25.8,20.6 30.3,25.1 J3c.4
SYNC: M1.5 U1c.32 | length 71.5
  Top Layer w0.25: v1(-9.1,17) -7.2,17 -6.6,17.6 3.2,17.6 4.3,16.5 8.6,16.5 9.9,15.2 11.1,15.2 11.65,15.75 U1c.32
  Bottom Layer w0.25: M1.5 -38.07,-1.17 -32.3,4.6 -18.7,4.6 -13.9,9.4 -13.9,12.2 v1(-9.1,17)
USART2RXD: M1.4 R2.2 U1c.13 | length 73.3
  Top Layer w0.25: M1.4 -42.83,1.37 -41,3.2 R2.2 -39.521,17.621 v1(-39.5,17.6) ; v1(-9,25.7) -5.2,25.7 -4.7,26.2 1.7,26.2 3.1,27.6 4.9,27.6 5.05,27.45 U1c.13
  Bottom Layer w0.25: v1(-39.5,17.6) -20,17.6 -19.1,18.5 -19.1,23.1 -17.6,24.6 -10.1,24.6 v1(-9,25.7)
USART2TXD: M1.3 R1.2 U1c.12 | length 78
  Top Layer w0.25: v1(-45.2,18.9) -43.921,17.621 R1.2 -42.8,16.721 -42.8,4.4 -43.29,3.91 M1.3 ; v1(-5.8,26.8) 1.5,26.8 3,28.3 7.15,28.3 U1c.12
  Bottom Layer w0.25: v1(-45.2,18.9) -19.9,18.9 -19.7,19.1 -19.7,23.3 -17.7,25.3 -11.1,25.3 -9.6,26.8 v1(-5.8,26.8)
pads on no net: D2c.0 D3c.0 D4c.0 D5c.0 J3c.1 PAD1.1 PAD2.1 PAD3.1 PAD4.1 REF1.1 REF2.1 U1c.1 U1c.2 U1c.3 U1c.4 U1c.11 U1c.16 U1c.17 U1c.18 U1c.29 U1c.38 U2c.7 U2c.8 U2c.9 U2c.10 X1c.3 X1c.4

## Polygon pours and split planes (outlines as drawn)
GND on Top Layer "GNDTop" (solid, remove dead copper, pour order 1000): -52.5,50 52.5,50 52.5,-18.5 -52.5,-18.5
GND on Bottom Layer "GNDBot" (solid, remove dead copper, pour order 1001): -52.5,50 52.5,50 52.5,-15.7 -52.5,-15.7

## Keep-outs
Keep-Out Layer:
  the board outline again, w0.254

## Other copper
Top Layer:
  pour cut-out: -37.9,26.8 -24.9,26.8 -24.9,19.2 -37.9,19.2

## Silkscreen, mask and mechanical layers (free items; w line width, h text height)
Bottom Overlay:
  text "RESET" at 41.9,40.4 h1.52
  text "TEST" at -10,34.3 h1.52
  text "PLUS" at 27.2,19.7 h1.52
  text "A+" at 27.5,17.4 h1.52
  text "B-" at 27.6,14.8 h1.52
  text "MINUS" at 26.6,12.4 h1.52
  text "PLUS" at 26.8,6.5 h1.52
  text "A+" at 27.4,4.1 h1.52
  text "B-" at 27.4,1.6 h1.52
  text "MINUS" at 27.4,-0.9 h1.52
  text "PLUS" at 26,-9.2 h1.52
  text "PLUS" at -12.3,-9.4 h1.52
  text "<---Sout" at -6.7,-14.2 h1.52
  text "Sin<---" at 26,-14.3 h1.52
  text "MINUS" at 25.7,-19.2 h1.52
  text "MINUS" at -11.1,-19.3 h1.52
  text "NC" at -14.9,-36 h1.52
  text "NC" at 25.7,-36.2 h1.52
  text "COM" at -14,-41 h1.52
  text "COM" at 25.8,-41.2 h1.52
  text "NO" at -15.2,-46 h1.52
  text "NO" at 25.9,-46.1 h1.52
Obrys:
  the board outline again, w0.254
Case:
  drawing of 154 lines, arcs and shapes, not listed
  text "NOS" at -4.65,71.12 h4
  text "91,100" at -31.335,2.861 h1.75 r90
  text "102,100" at -40.45,2.215 h1.75 r90
  text "119,100" at -23.31,-9.221 h1.75 r90
  text "107,900" at 15.636,-26.781 h1.75 r90
  text "97,300" at -4.601,-39.456 h1.75

## Dimensions
52.5,50 to 44.8,23 on Dims
44.8,23 to 44.65,15 on Dims
-52.5,-50 to 52.5,-50 on Dims
52.5,-50 to 52.5,50 on Dims
48.65,45.55 to 55.1,23 on Dims

## Text inside footprints (layer, text, board x,y; h text height)
C1u: Bottom Overlay "+" at -9.6,-4.6 h1.52 r270